# Altium PCB panel.PcbDoc
Units mil, origin at the board's own origin, x right, y up, seen from the top; angles counter-clockwise.
Board outline 2800 x 2600 mil, 2 copper layers (Top Layer, Bottom Layer); 14 components, 14 nets, 58 pads, 0 vias.
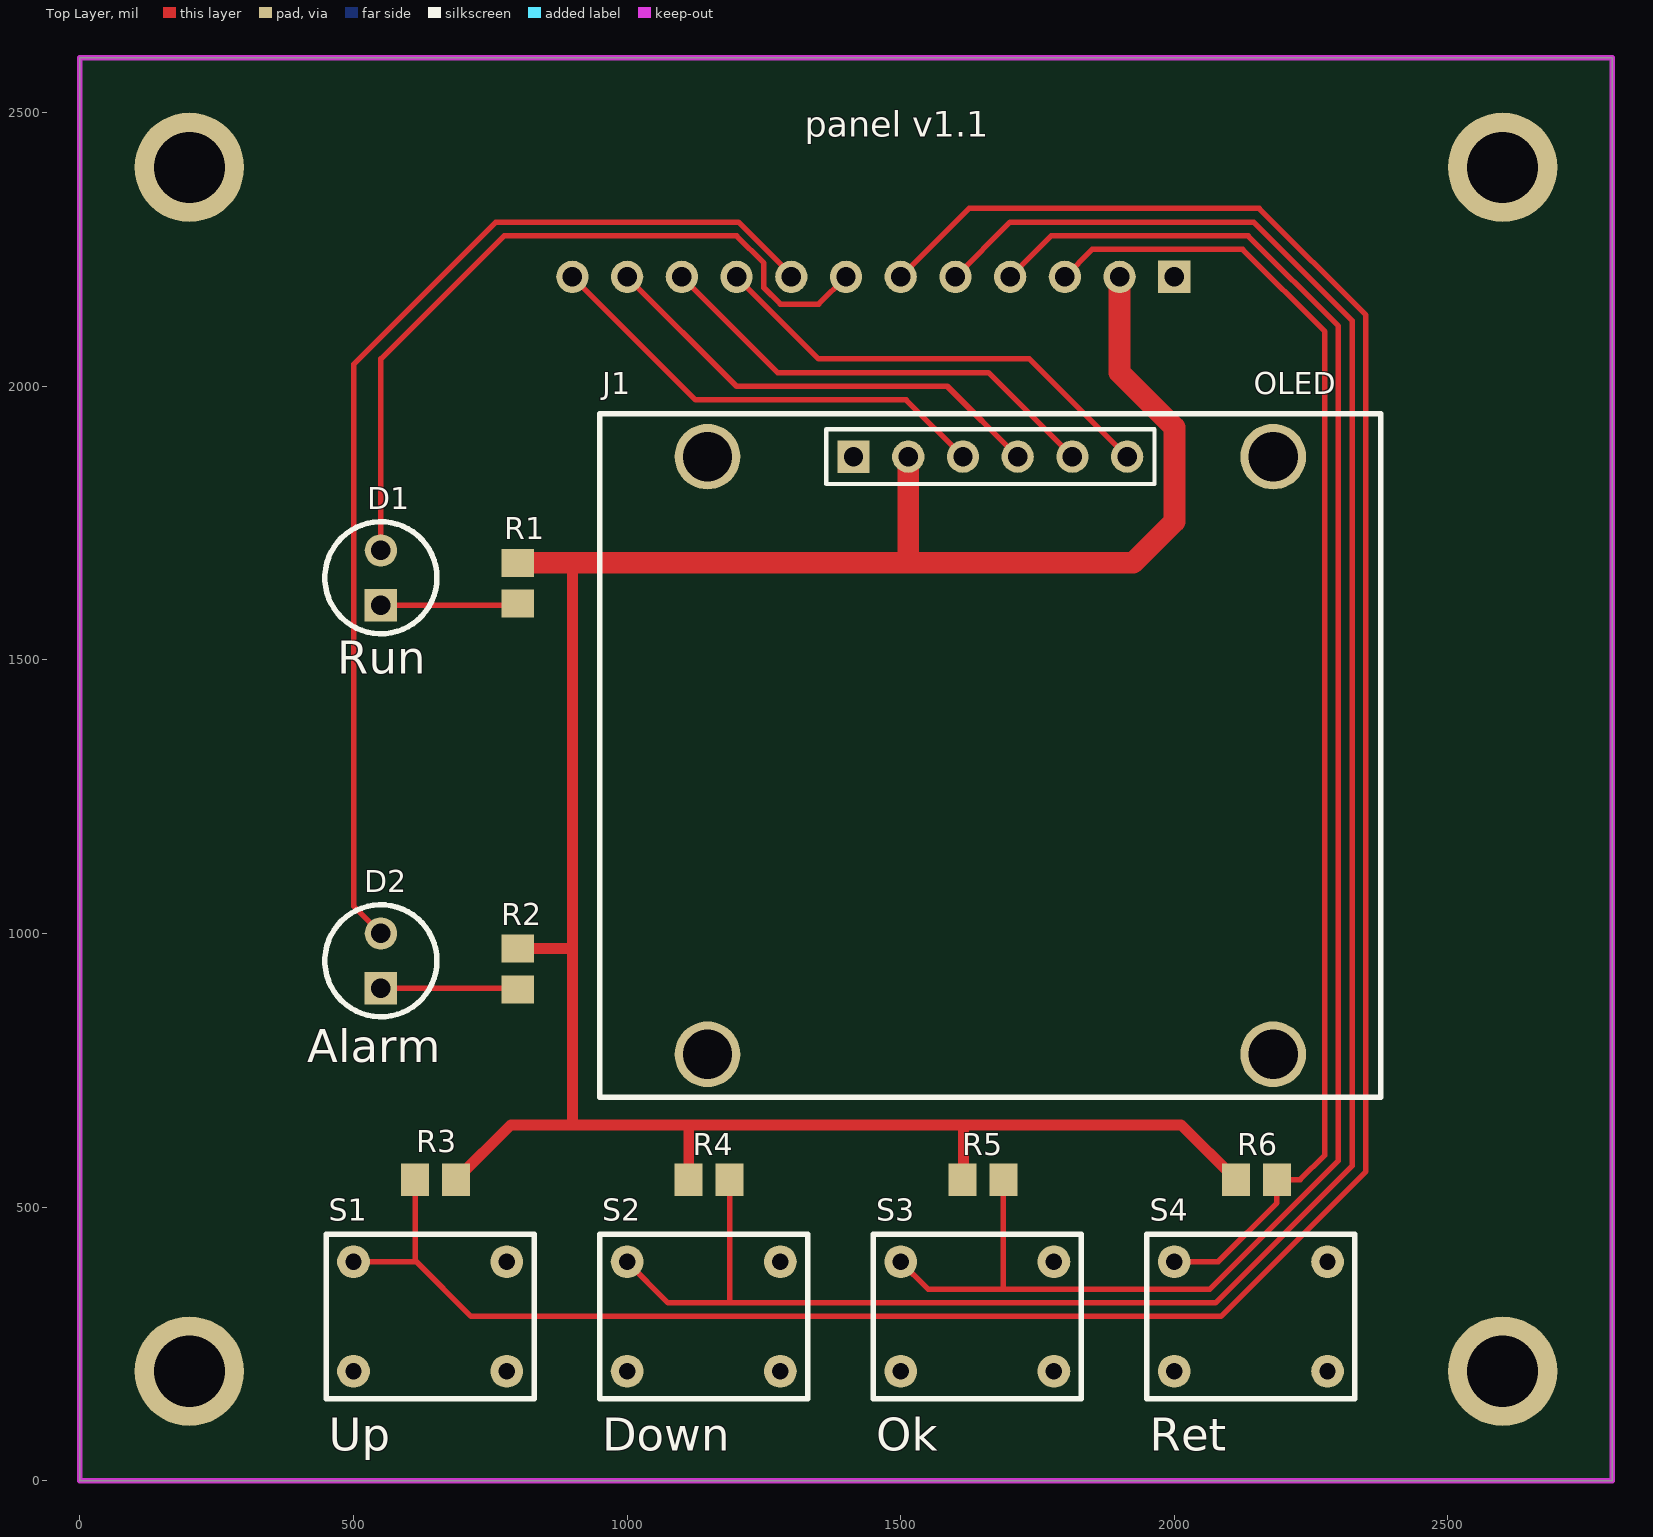
[diagram p0: Top Layer view]
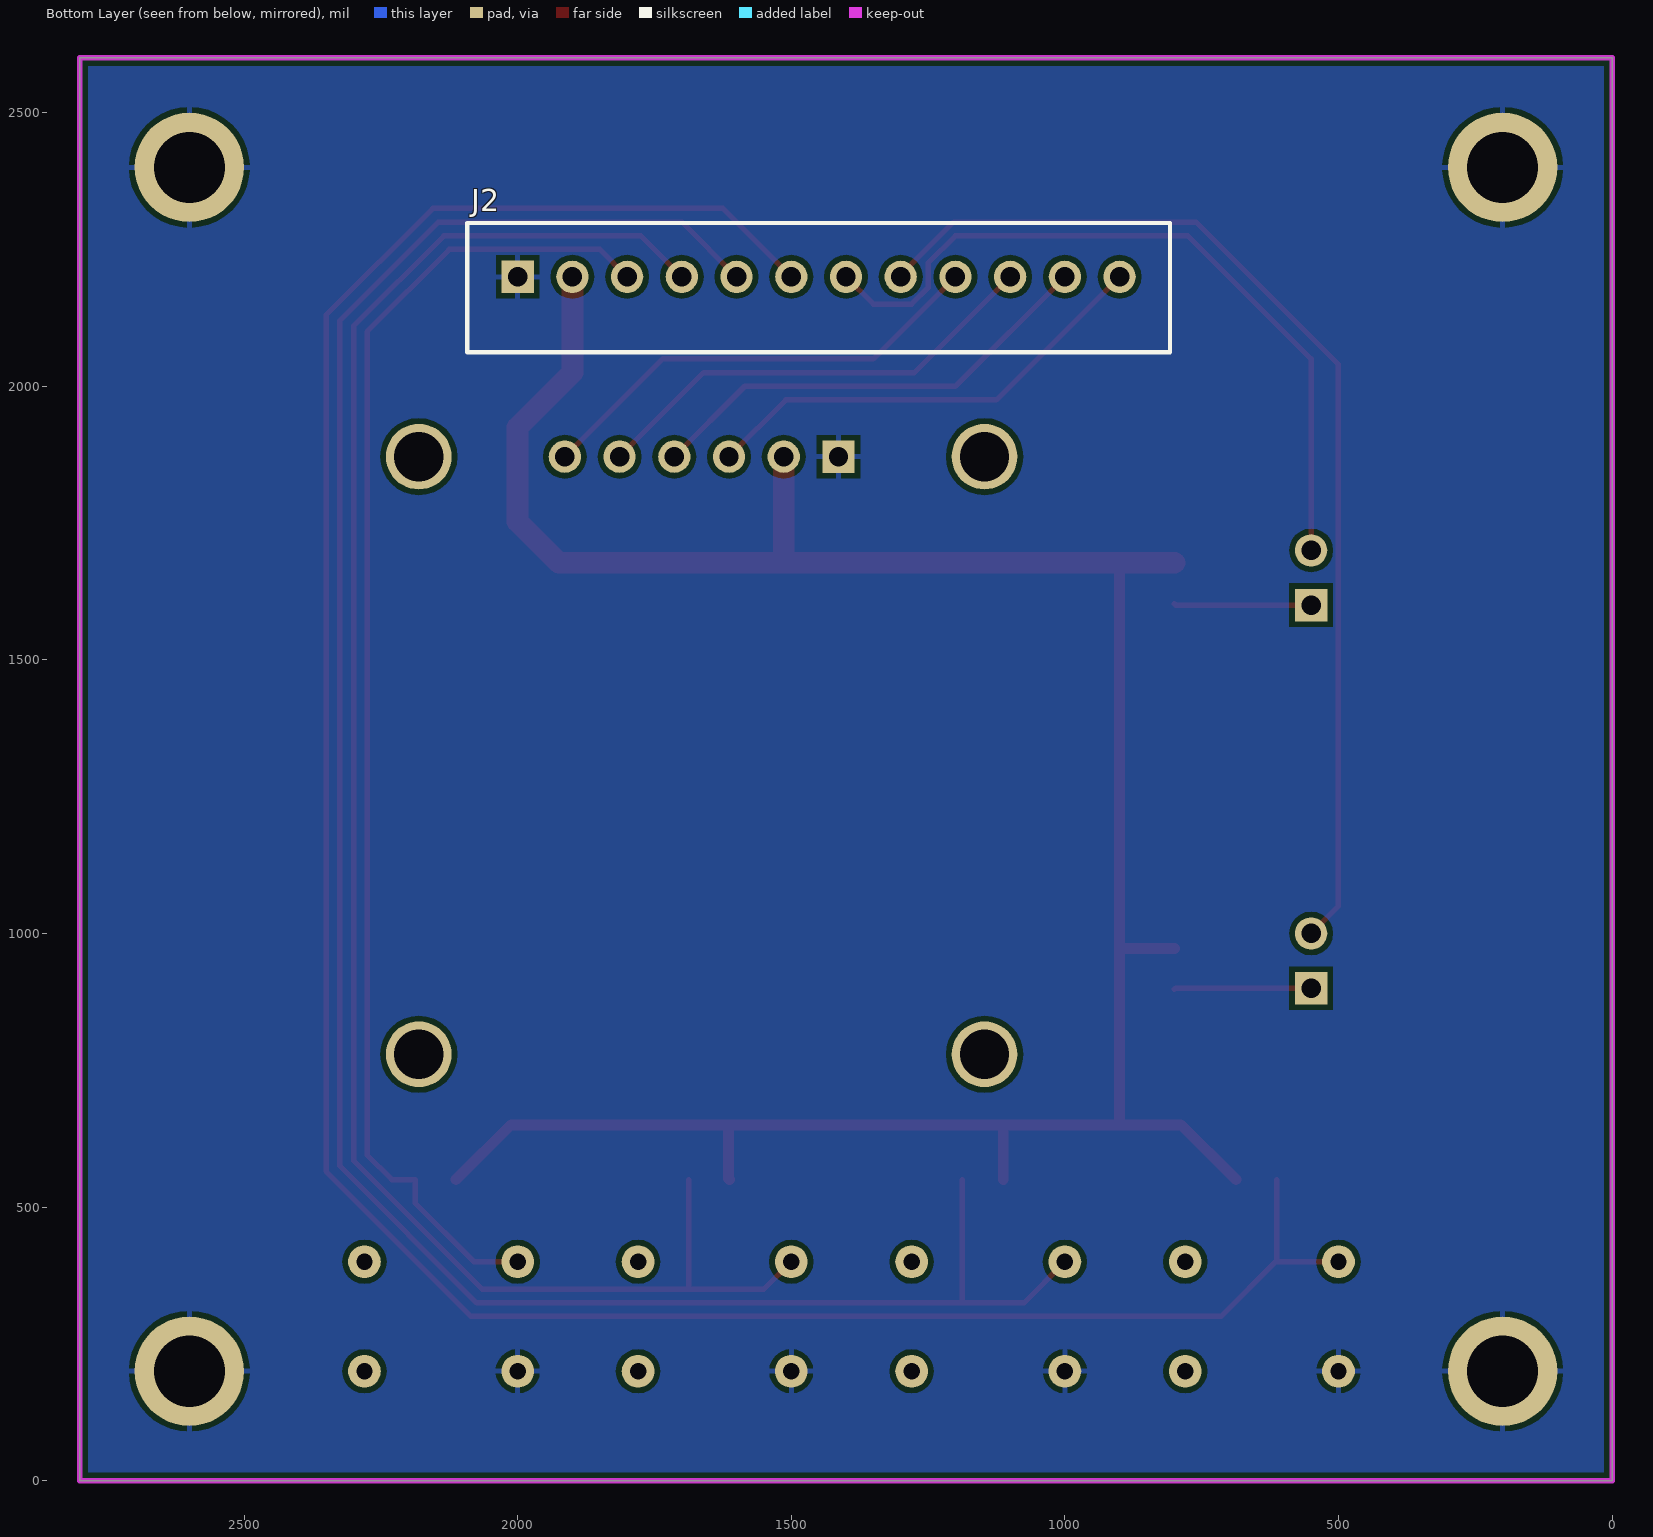
[diagram p1: Bottom Layer view, seen from below]

## Layer stack, top to bottom
Top Solder: solder mask 0.4, Solder Resist, Dk 3.5
Top Layer: signal copper 1.4
Dielectric 1: dielectric 12.6, FR-4, Dk 4.8
Bottom Layer: signal copper 1.4
Bottom Solder: solder mask 0.4, Solder Resist, Dk 3.5

## Board outline
0,0 2800,0 2800,2600 0,2600
cut-out: 3890,1205
cut-out: 0,1530

## Design rules (kind name [scope] priority, off if disabled: settings)
Clearance [All] p1: gap=10 ignorepadtopadclearanceinfootprint=FALSE except(0: Arc-Hole Track-Hole SMDPad-Hole THPad-Hole Via-Hole Fill-Hole Poly-Hole Region-Hole Text-Hole)
HoleSize [All] p1: absolutevalues=TRUE maxlimit=130 minlimit=1 maxpercent=80.000 minpercent=20.000
PolygonConnect [All] p1: connectstyle=Relief reliefconductorwidth=10 reliefentries=4 polygonreliefangle="90 Angle" airgapwidth=10
RoutingVias [All] p1: holewidth=28 width=50 viastyle="Through Hole" minholewidth=28 minwidth=50 maxholewidth=28 maxwidth=50
SolderMaskExpansion [All] p1: expansion=4
Width VCC [InNet('VCC')] p1: maxlimit=40 minlimit=20 preferedwidth=40 minimp=50.000000 maximp=50.000000 favimp=50.000000
Width [All] p2: maxlimit=10 minlimit=10 preferedwidth=10
29 further rules are at their usual default settings.

## Components (designator, comment, footprint, x,y, rotation, side; value= is the part's Value field where it differs from the comment)
D1 "Run" LED-2P 550,1600 r90 top
D2 "Alarm" LED-2P 550,900 r90 top
J1 "OLED" OLED 950,1950 r0 top
J2 "" XH2.54-12P 2000,2200 r180 bottom
R1 "102" 0805 800,1640 r270 top
R2 "102" 0805 800,935 r90 top
R3 "103" 0805 650,550 r180 top
R4 "103" 0805 1150,550 r0 top
R5 "103" 0805 1650,550 r0 top
R6 "103" 0805 2150,550 r0 top
S1 "Up" SW-PB 780,200 r180 top
S2 "Down" SW-PB 1280,200 r180 top
S3 "Ok" SW-PB 1780,200 r180 top
S4 "Ret" SW-PB 2280,200 r180 top

## Footprints (in the part's own frame and the unit in brackets; to place one, negate y for a bottom-side part, rotate by r counter-clockwise, add the part's x,y. Pads: shape width x height; smd on the part's side, far side on the other; paste and mask are expansions set on the pad)
0805 [mm]
  rect 1.3x1.5 smd: 1(-0.95,0) 2(0.95,0)
LED-2P [mm]
  rect 1.5x1.5 hole 0.9: 1(0,0)
  round 1.5 hole 0.9: 2(2.54,0)
  silkscreen extent -1.33,-2.6 3.87,2.6
OLED [mm]
  rect 1.5x1.5 hole 0.9: 1(11.78,-2)
  round 1.5 hole 0.9: 2(14.32,-2) 3(16.86,-2) 4(19.4,-2) 5(21.94,-2) 6(24.48,-2)
  round 3.048 hole 2.286: ""(5,-29.74) ""(5,-2) ""(31.26,-29.74) ""(31.26,-2)
  silkscreen extent 0,-31.74 36.26,0
SW-PB [mil]
  round 60 hole 30: 1(280,0) 2(280,-200) 3(0,0) 4(0,-200)
  silkscreen extent -50,-250 330,50
XH2.54-12P [mm]
  rect 1.5x1.5 hole 0.9: 1(0,0)
  round 1.5 hole 0.9: 2(2.54,0) 3(5.08,0) 4(7.62,0) 5(10.16,0) 6(12.7,0) 7(15.24,0) 8(17.78,0) 9(20.32,0) 10(22.86,0) 11(25.4,0) 12(27.94,0)
  silkscreen extent -2.34,-3.5 30.28,2.5

## Part data
D1 D2: library part LED, "Typical INFRARED GaAs LED"
J2: library part "Header 12", "Header, 12-Pin", LatestRevisionDate=17-Jul-2002, LatestRevisionNote="Re-released for DXP Platform.", Publisher="Altium Limited"
R1 R2 R3 R4 R5 R6: library part Res, "Resistor"
  R3 R4 R5 R6: LatestRevisionDate=17-Jul-2002, LatestRevisionNote="Re-released for DXP Platform.", Published=8-Jun-2000, Publisher="Altium Limited"
S1 S2 S3 S4: library part SW-PB, "Switch"

## Free pads (board coordinates)
  round 200 hole 130: ""(200,200) ""(200,2400) ""(2600,200) ""(2600,2400)

## Nets (pads, with @x,y where several pads share a name; then routed paths per layer and width w, separated by ;. In a path a pad name is that pad's centre, name@x,y a point inside that pad or via, vN(x,y) a via of type N, cw(c..) or ccw(c..) an arc to the next point about the centre after c; other vN are vias at no path point)
GND: J1.1 J2.1 pad. S1.1 S2.1 S3.1 S4.1
NetD1_1: D1.1 R1.2 | length 251.1
  Top Layer w10: D1.1 797.4,1600 R1.2
NetD1_2: D1.2 J2.7 | length 1392
  Top Layer w10: D1.2 550,2050 775,2275 1200,2275 1250,2225 1250,2180 1280,2150 1350,2150 J2.7
NetD2_1: D2.1 R2.1 | length 251
  Top Layer w10: D2.1 797.6,900 R2.1
NetD2_2: D2.2 J2.8 | length 2011.8
  Top Layer w10: D2.2 500,1050 500,2040 760,2300 1203.28,2300 1300,2203.28 J2.8
NetJ1_3: J1.3 J2.12 | length 849.9
  Top Layer w10: J2.12 1125,1975 1510.04,1975 J1.3
NetJ1_4: J1.4 J2.11 | length 849.9
  Top Layer w10: J2.11 1200,2000 1585.04,2000 J1.4
NetJ1_5: J1.5 J2.10 | length 849.9
  Top Layer w10: J2.10 1275,2025 1660.04,2025 J1.5
NetJ1_6: J1.6 J2.9 | length 849.9
  Top Layer w10: J2.9 1350,2050 1735.04,2050 J1.6
NetJ2_3: J2.3 R6.2 S4.2 | length 2443.6
  Top Layer w10: J2.3 1850,2250 2125,2250 2275,2100 2275,595 2230,550 R6.2 2187.4,507.4 2080,400 S4.2
NetJ2_4: J2.4 R5.2 S3.2 | length 3343.5
  Top Layer w10: S3.2 1550,350 1685,350 ; R5.2 1687.4,352.4 1685,350 ; J2.4 1775,2275 2135,2275 2300,2110 2300,585 2065,350 1685,350
NetJ2_5: J2.5 R4.2 S2.2 | length 4071.7
  Top Layer w10: S2.2 1075,325 1190,325 ; R4.2 1187.4,327.6 1190,325 ; J2.5 1700,2300 2145,2300 2325,2120 2325,575 2075,325 1190,325
NetJ2_6: J2.6 R3.2 S1.2 | length 4696.3
  Top Layer w10: S1.2 615,400 715,300 2085,300 2350,565 2350,2130 2155,2325 1625,2325 J2.6 ; 612.6,402.4 R3.2
VCC: J1.2 J2.2 R1.1 R2.2 R3.1 R4.1 R5.1 R6.1 | length 4746.1
  Top Layer w20: R3.1 787.4,650 900,650 ; R2.2 897.6,972.4 ; 900,1677.4 900,970 900,650 ; R4.1 1112.6,647.6 ; R5.1 1615,552.4 1615,650 ; R6.1 2012.6,650 1615,650 ; 900,650 1615,650
  Top Layer w40: R1.1 900,1677.4 1515,1677.4 ; J1.2 1513.78,1678.62 1515,1677.4 ; J2.2 1900,2025 2000,1925 2000,1752.4 1925,1677.4 1515,1677.4
pads on no net: J1. S1.3 S1.4 S2.3 S2.4 S3.3 S3.4 S4.3 S4.4

## Polygon pours and split planes (outlines as drawn)
GND on Bottom Layer "Bottom Layer-GND" (solid, pour order 8): 2800,2600 2800,0 0,0 0,2600

## Keep-outs
Keep-Out Layer:
  the board outline again, w10

## Silkscreen, mask and mechanical layers (free items; w line width, h text height)
Top Overlay:
  text "panel v1.1" at 1325,2440 h80